# EAGLE board final esp32 pc_heart v2.3 (EAGLE 9.6.0)
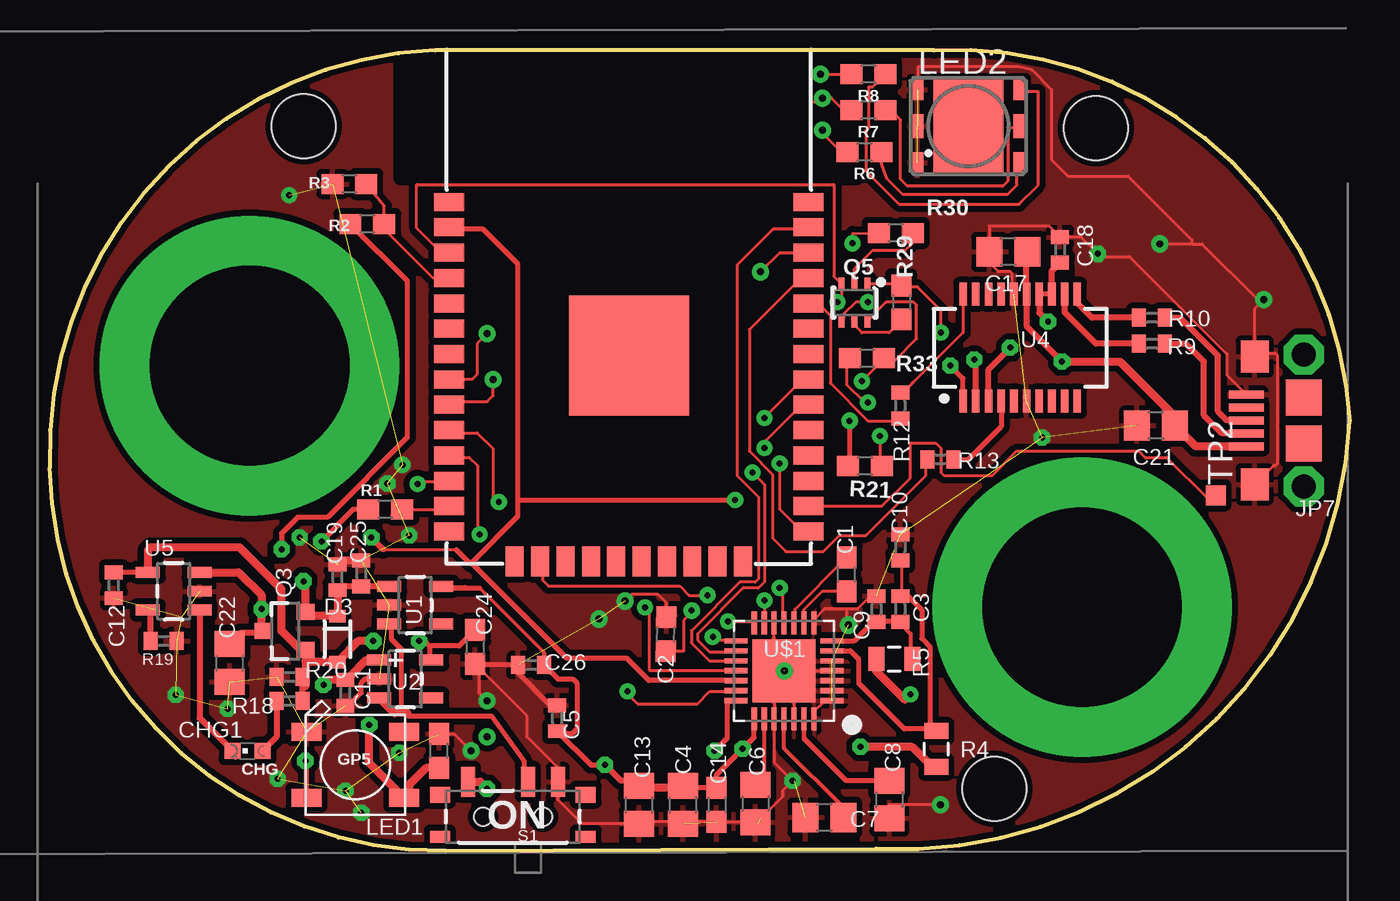
[diagram p0: board, top side]
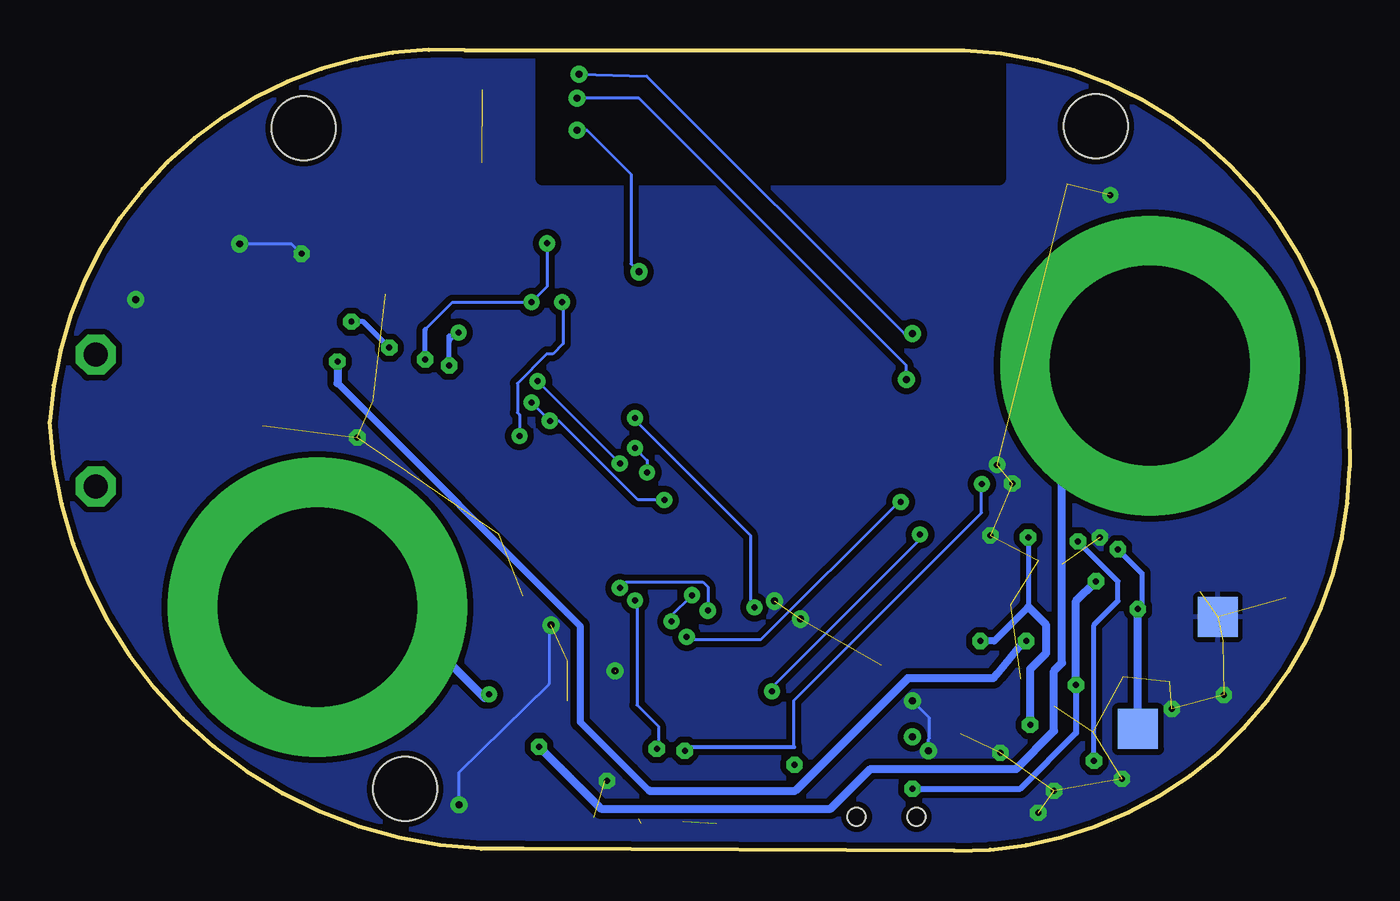
[diagram p1: board, bottom side, seen from below]

Size 65.1 x 40.12 mm. Coordinates in mm from the lower left corner, seen from the top.
Outline: 44.3,40.1 19.3,40.1 arc90 0,19.2 arc90 19.8,0 41.4,0.1 arc90 65.1,21.5 arc90 44.3,40.1
Copper layers (1*16): Top 0.035mm / dielectric 1.5mm / Bottom 0.035mm
Design rules "Circuitects-Rules *": minimum track width 6mil, minimum drill 0.3mm, track to track 6mil, track to pad 6mil, pad to pad 6mil, via to via 6mil, smd to smd 6mil, copper to edge 10mil, drill to drill 8mil, minimum pad ring 12mil, minimum via ring 10mil, stop-mask expansion 4mil, vias tented up to drill 25mil, thermal gap 10mil
Net classes: 2 gnd: width 0.254 mm, drill 0.254 mm, clearance 0.178 mm
Holes 3.2 mm at 47.3,3.1 12.7,36.3 52.4,36.2

## Footprints (pad centres in the part's own frame; a part is rotated, then mirrored left to right if it is on the bottom)
C0603 = smd 1.1 x 1: 1 -0.85,0; 2 0.85,0
C0402 = smd 0.7 x 0.9: 1 -0.65,0; 2 0.65,0
C0805 = smd 1.3 x 1.5: 1 -0.95,0; 2 0.95,0
0603 = smd 1.1 x 1: 1 -0.85,0; 2 0.85,0
CHIPLED_0603 = smd 0.8 x 0.8: A 0,-0.75; C 0,0.75
SOD-323 = smd 0.63 x 0.83: A 1.15,0; C -1.15,0
MICRO-B = smd 0.4 x 1.75: 1 -1.25,2.975; 2 -0.6,2.975; 3 0.05,2.975; 4 0.7,2.975; 5 1.35,2.975 | smd 1.8 x 1.8: P$1 -1.1,0.1; P$2 1.2,0.1 | drill 1.2 pad 2 octagon: P$3 -3.25,0.1; P$4 3.35,0.1 | smd 1.6 x 1.4: P$5 -3.15,2.55; P$6 3.25,2.55
WS2812B = smd 1.5 x 0.9: 1-VDD 2.45,-1.65; 2-DOUT 2.45,1.65; 3-GND -2.45,1.65; 4-DIN -2.45,-1.65
F50360 = smd 0.6 x 1.05: BA 2.55,1.825; BC -2.55,1.825; RA 2.55,-1.825; RC -2.55,-1.825 | smd 0.6 x 1.2: GA 2.55,0; GC -2.55,0 | smd 3.5 x 4.7: NC 0,0
SOT23-3 = smd 0.8 x 0.9: 1 -0.95,-1; 2 0.95,-1; 3 0,1.1
SC70-6 = smd 0.3 x 0.66: 1 -0.65,-0.92; 2 0,-0.92; 3 0.65,-0.92; 4 0.65,0.92; 5 0,0.92; 6 -0.65,0.92
0805 = smd 0.8 x 1.2: 1 -0.9,0; 2 0.9,0
R0402 = smd 0.7 x 0.9: 1 -0.65,0; 2 0.65,0
SWITCH-SPST-SMD-A = smd 0.7 x 1.5: 1 -2.25,-1.75; 2 -0.75,-1.75; 3 2.25,-1.75 | smd 1 x 0.6: GND1 -3.65,1; GND3 3.65,1 | smd 1 x 0.8: GND2 -3.65,-1.1; GND4 3.65,-1.1 | hole 0.9: -1.5,0; 1.5,0
TP20SQ = smd 2 x 2: TP 0,0
TP10SQ = smd 1 x 1: TP 0,0
SOT23-5 = smd 0.55 x 1.2: 1 -0.95,-1.3; 2 0,-1.3; 3 0.95,-1.3; 4 0.95,1.3; 5 -0.95,1.3
ESP-WROOM-32 = smd 0.9 x 1.5: 1 7.7,9; 2 6.43,9; 3 5.16,9; 4 3.89,9; 5 2.62,9; 6 1.35,9; 7 0.08,9; 8 -1.19,9; 9 -2.46,9; 10 -3.73,9; 11 -5,9; 12 -6.27,9; 13 -7.54,9; 14 -8.81,9; 25 -8.81,-9; 26 -7.54,-9; 27 -6.27,-9; 28 -5,-9; 29 -3.73,-9; 30 -2.46,-9; 31 -1.19,-9; 32 0.08,-9; 33 1.35,-9; 34 2.62,-9; 35 3.89,-9; 36 5.16,-9; 37 6.43,-9; 38 7.7,-9 | smd 1.5 x 0.9: 15 -10.3,5.715; 16 -10.3,4.445; 17 -10.3,3.175; 18 -10.3,1.905; 19 -10.3,0.635; 20 -10.3,-0.635; 21 -10.3,-1.905; 22 -10.3,-3.175; 23 -10.3,-4.445; 24 -10.3,-5.715 | smd 6 x 6: GND 0,0
SSOP20_L = smd 0.381 x 1.143: 1 -2.857,-2.68; 2 -2.223,-2.68; 3 -1.587,-2.68; 4 -0.953,-2.68; 5 -0.318,-2.68; 6 0.318,-2.68; 7 0.953,-2.68; 8 1.587,-2.68; 9 2.223,-2.68; 10 2.857,-2.68; 11 2.857,2.68; 12 2.223,2.68; 13 1.587,2.68; 14 0.953,2.68; 15 0.318,2.68; 16 -0.318,2.68; 17 -0.953,2.68; 18 -1.587,2.68; 19 -2.223,2.68; 20 -2.857,2.68
QFN-28 = smd 1.15 x 0.27: 1 -2.4,1.5; 2 -2.4,1; 3 -2.4,0.5; 4 -2.4,0; 5 -2.4,-0.5; 6 -2.4,-1; 7 -2.4,-1.5; 15 2.4,-1.5; 16 2.4,-1; 17 2.4,-0.5; 18 2.4,0; 19 2.4,0.5; 20 2.4,1; 21 2.4,1.5 | smd 0.27 x 1.15: 8 -1.5,-2.4; 9 -1,-2.4; 10 -0.5,-2.4; 11 0,-2.4; 12 0.5,-2.4; 13 1,-2.4; 14 1.5,-2.4; 22 1.5,2.4; 23 1,2.4; 24 0.5,2.4; 25 0,2.4; 26 -0.5,2.4; 27 -1,2.4; 28 -1.5,2.4 | smd 3.15 x 3.15: THERMAL 0,0

## Placement (x,y rotation side)
C1  1uF  [C0603]  39.91,13.84 90 top
C2  1nF  [C0603]  30.86,10.84 88.7 top
C3  1000pF  [C0402]  42.6,12.1 270 top
C4  10uF  [C0805]  31.7,2.3 270 top
C5  1uF  [C0402]  25.41,6.64 90 top
C6  10uF  [C0805]  35.34,2.36 270 top
C7  10uF  [C0805]  38.79,1.66 180 top
C8  1uF  [C0805]  42.04,2.56 270 top
C9  10pF  [C0402]  41.4,12.1 90 top
C10  10pF  [C0402]  42.6,15.2 90 top
C11  1u  [C0402]  14.8,7.9 90 top
C12  0.1uF  [C0402]  3.2,13.3 270 top
C13  1uF  [C0805]  29.5,2.3 270 top
C14  10uF  [C0603]  33.4,2.3 270 top
C17  10uF  [C0805]  48,30 180 top
C18  0.1uF  [C0402]  50.6,30.1 90 top
C19  1.0uF  [C0402]  14.4,13.7 90 top
C20  0.1uF  [0603]  19.5,5 90 top
C21  4.7u  [C0805]  55.4,21.3 180 top
C22  4.7u  [C0805]  9,9.4 270 top
C24  2.2uF  [C0603]  21.3,10.2 270 top
C25  1u  [C0402]  15.6,13.9 270 top
C26  1u  [C0402]  24.1,9.3 0 top
CHG1  RED  [CHIPLED_0603]  9.9,5 90 top
D3  BAT20J  [SOD-323]  14.4,10.6 270 top
JP7  MICRO-B  [MICRO-B]  62.9,21.5 90 top
LED1  WS2812B5050  [WS2812B]  15.3,4.3 0 top
LED2  F50360  [F50360]  46,36.3 0 top
Q3  2.5A/30V  [SOT23-3]  11.8,11 90 top
Q5  MBT3904DW1T1  [SC70-6]  40.3,27.46 180 top
R1  10k  [0603]  16.8,17.1 0 top
R2  10k  [0603]  15.9,31.4 180 top
R3  10k  [0603]  15,33.4 0 top
R4  49.9K  [0805]  44.4,5.1 90 top
R5  49.9K  [0805]  42.3,9.6 0 top
R6  560  [0603]  40.8,35 180 top
R7  560  [0603]  41,37.1 180 top
R8  560  [0603]  41,38.9 180 top
R9  27  [R0402]  55.2,25.4 180 top
R10  27  [R0402]  55.2,26.7 180 top
R12  1K  [R0402]  42.6,22.3 90 top
R13  1K  [R0402]  44.6,19.6 0 top
R18  330R  [R0402]  12,7.5 180 top
R19  1k  [R0402]  5.7,10.5 180 top
R20  10K  [R0402]  12,8.7 0 top
R21  10k  [0603]  40.82,19.27 180 top
R29  10k  [0603]  42.65,27.47 270 top
R30  10k  [0603]  42.37,30.95 0 top
R33  10k  [0603]  40.93,24.67 180 top
S1  PCM12SMTR  [SWITCH-SPST-SMD-A]  23.19,1.7 180 top
TP1  TPSQTP20SQ  [TP20SQ]  6.6,11.7 0 bottom
TP2  PTR1TP10SQ  [TP10SQ]  58.4,17.8 0 top
TP4  TPSQTP20SQ  [TP20SQ]  10.6,6.1 0 bottom
U1  AP2112K-1.8V  [SOT23-5]  18.3,12.3 270 top
U2  AP2112K-3.3V  [SOT23-5]  17.8,8.6 270 top
U3  ESP-WROOM-32  [ESP-WROOM-32]  29,24.8 90 top
U4  FTS31XS-U  [SSOP20_L]  48.6,25.2 0 top
U5  MCP73831  [SOT23-5]  6.2,13 90 top
U$1  MAX30003CTI+  [QFN-28]  36.77,9.01 180 top

## Library data of the parts
C1-C14 C17-C19 C21 C22 C24-C26 R9 R10 R12 R13 R18-R20 = rcl
C20 = SparkFun-Capacitors; PROD_ID: CAP-00810
CHG1 LED2 = led
D3 = SparkFun-DiscreteSemi; PROD_ID: DIO-11623
JP7 U$1 = circuitects
LED1 = adafruit
Q3 = SparkFun-DiscreteSemi; PROD_ID: TRANS-11308
Q5 = esp32-thing-temp; PROD_ID: TRANS-13337
R1-R3 R6-R8 R21 R29 R30 R33 = SparkFun-Resistors; PROD_ID: RES-00824
R4 R5 U5 = SparkFun
S1 = SparkFun-Electromechanical; PROD_ID: SWCH-10651
TP1 TP2 TP4 = testpad
U1 U2 = SparkFun-PowerIC; PROD_ID: VREG-12457
U3 = esp32
U4 = SparkFun-DigitalIC; PROD_ID: IC-11524

## Nets
0: Q5.6 R33.1 U3.25
1.8V: C4.1 C5.1 C13.1 C14.1 C26.2 U1.5 U$1.13 U$1.22
3.3V: C20.1 C24.1 LED1.1-VDD R21.2 R33.2 U2.5 U3.2 U$1.19
3.3V_F: C18.1 U4.3 U4.13 U4.14
5: U3.29
BAT_MON: R2.1 R3.2 U3.4
CHIP_PU: Q5.3 R21.1 U3.3
CSB: U3.10 U$1.15
D+: JP7.3 R10.1
D-: JP7.2 R9.1
DTR: Q5.1 R29.1 U4.1
ECG_N: R5.1
ECG_P: R4.1
ECGN: C3.2 C9.1 R5.2 U$1.7
ECGP: C3.1 C10.1 R4.2 U$1.6
EN: S1.2 U1.3 U2.3
FCLK: U3.16 U$1.14
GND: C2.2 C4.2 C5.2 C6.2 C7.2 C8.2 C9.2 C10.2 C11.1 C12.2 C13.2 C14.2 C17.2 C18.2 C19.2 C20.2 C21.2 C22.2 C24.2 C25.1 C26.1 JP7.5 JP7.P$5 JP7.P$6 LED1.3-GND LED2.BC LED2.GC LED2.RC R3.1 R19.1 R20.1 S1.1 TP1.TP U1.2 U2.2 U4.6 U4.16 U5.2 U$1.1 U$1.2 U$1.3 U$1.4 U$1.5 U$1.8 U$1.12 U$1.24 U$1.26 U$1.28 U$1.THERMAL
INT2B: U3.11 U$1.20
INTB: U3.12 U$1.21
MISO: U3.31 U$1.18
MOSI: U3.37 U$1.17
N$1: LED1.4-DIN R1.1
N$2: C6.1 U$1.23
N$3: C1.1 U$1.9
N$4: TP2.TP U3.26
N$5: CHG1.C U5.1
N$6: C1.2 U$1.10
N$7: C2.1 U$1.11
N$9: R9.2 U4.12
N$10: LED2.RA R6.1
N$11: R10.2 U4.11
N$12: R7.2 U3.9
N$13: C7.1 U$1.25
N$14: C8.1 U$1.27
N$15: LED2.BA R8.1
N$16: CHG1.A R18.2
N$17: LED2.GA R7.1
N$19: R19.2 U5.5
N$20: R8.2 U3.8
N$22: R6.2 U3.36
N$23: Q5.5 R29.2
N$24: Q5.2 R30.2
RTS: Q5.4 R30.1 U4.2
RXD: R13.2 U4.4
SCLK: U3.30 U$1.16
TXD: R12.2 U4.20
U0RXD: R12.1 U3.34
U0TXD: R13.1 U3.35
VBAT: C22.1 Q3.3 R2.2 TP4.TP U5.3
VIN: C11.2 C19.1 C25.2 D3.C Q3.2 S1.3 U1.1 U2.1
VUSB: C12.1 C17.1 C21.1 D3.A JP7.1 Q3.1 R18.1 R20.2 U4.15 U5.4
WS2812/GPIO14: R1.2 U3.13

## Tracks (layer width: path | path; a pad name or v marks a point on that pad's centre or on a via)
0  (via drill 0.3)
  Top 0.152: Q5.6 40.97,26.56 41.89,27.48 43.26,27.48 43.41,27.33 43.41,25.66 42.34,24.58 41.8,24.58 R33.1 41.78,24.63 v40.67,23.52 | v36.55,19.4 36.55,17.12 37.62,16.05 37.93,16.05 U3.25
  Bottom 0.152: v40.67,23.52 v36.55,19.4
1.8V  (via drill 0.3)
  Top 0.152: 24.72,8.97 24.75,8.97 C26.2 | 27.1,4.3 25.55,5.85 C5.1 25.21,5.99 | v35.79,12.54 35.79,11.48 U$1.13 | 19.64,13.15 U1.5 | U1.5 20.8,13.25 | U1.5 19.66,13.25
  Top 0.184: 21.52,13.15 24.75,9.93
  Top 0.194: 24.75,9.93 C26.2
  Top 0.252: 35.27,5.67 U$1.22 | 19.64,13.15 21.52,13.15
  Top 0.254: 35.27,5.67 v34.7,5.1 33.4,3.8 C14.1 31.8,3.15 C4.1 | 24.95,9.3 C26.2 25.45,8.6 26.2,8.6 26.4,8.4 26.4,6.1 26.15,5.85 25.55,5.85 | C5.1 27.1,4.3 v27.8,4.3
  Top 0.305: C13.1 29.5,3.5 28.6,3.5 v27.8,4.3 | C26.2 24.75,9
  Top 0.406: C4.1 31.6,3.15 29.6,3.15 C13.1
  Bottom 0.152: v35.79,12.54 35.69,12.45 35.69,7.3 34.62,6.23 34.62,5.17 v34.7,5.1
3.3V  (via drill 0.3)
  Top 0.152: v40.97,22.45 40.82,22.45 39.91,23.36 39.91,24.5 R33.2 | 40.06,19.29 R21.2 | U$1.19 34.35,8.53 | 20.35,15.09 16.7,15.09 16.7,15.1 | 20.09,31.14 U3.2 | 19.03,10.25 | U2.5 19.03,9.62
  Top 0.252: v40.06,21.54 40.06,19.29 | 19.03,9.62 19.03,10.25 20.5,10.25 C24.1 | 34.35,8.53 30.01,8.53 28.89,9.65 25.89,9.65 21.11,14.43 | 20.35,15.09 21.06,14.38 21.11,14.43 | 20.09,31.14 21.7,31.14 23.45,29.39 23.45,17.57 | 23.45,17.57 23.45,16.76 21.11,14.43 | v18.5,10.5 18.78,10.5 19.03,10.25 | 23.45,17.57 v34.33,17.57
  Top 0.305: 16.7,15.1 v16.1,15.7
  Top 0.406: C20.1 18.85,4.15 18,3.3 18,2.9 LED1.1-VDD 16,4.4 v16,6.3
  Bottom 0.152: v40.97,22.45 v40.06,21.54 39.6,21.54 35.64,17.57 v34.33,17.57
  Bottom 0.254: v16.1,15.7 16.1,12.2
  Bottom 0.305: 16.07,15.73 v16.1,15.7
  Bottom 0.354: 16.1,12.2 17.8,10.5 v18.5,10.5
  Bottom 0.406: v16,6.3 16,9.1 15.2,9.9 15.2,11.3 16.1,12.2
3.3V_F  (via drill 0.3)
  Top 0.254: U4.13 U4.14
  Top 0.305: U4.13 50.19,29.04 C18.1 | U4.3 47.01,24.11 v48.1,25.2 | U4.14 49.55,26.95 v50,26.5
  Bottom 0.254: v48.1,25.2 49.4,26.5 v50,26.5
BAT_MON
  Top 0.152: R3.2 16.75,32.29 R2.1 16.94,30.94 19.18,28.7 19.94,28.7 U3.4
CHIP_PU  (via drill 0.3)
  Top 0.152: U3.3 19.94,30.07 19.48,30.07 18.38,31.18 18.38,33.37 39.26,33.37 39.26,28.77 Q5.3 39.65,27.68 v39.45,27.48 | v41.58,20.77 41.58,19.29 R21.1
  Bottom 0.152: v41.58,20.77 41.58,21.84 41.69,21.95 41.69,23.41 40.21,24.89 39.91,24.89 39.4,25.4 39.4,27.43 v39.45,27.48
CSB  (via drill 0.3)
  Top 0.152: v33.2,10.72 33.35,10.56 34.27,10.56 U$1.15 | v22.49,17.47 22.19,17.77 22.19,20.14 21.4,20.93 20.09,20.93 U3.10
  Bottom 0.152: v33.2,10.72 33.05,10.56 29.5,10.56 22.59,17.47 v22.49,17.47
D+
  Top 0.305: JP7.3 58.95,21.55 58.5,22 58.5,24.8 56.6,26.7 R10.1
D-
  Top 0.305: JP7.2 58.7,20.9 57.8,21.8 57.8,24.5 56.9,25.4 R9.1
DTR  (via drill 0.3)
  Top 0.152: Q5.1 40.97,28.39 42.65,28.39 R29.1 42.65,28.24 43.45,28.24 44.63,27.06 v44.63,25.96
  Top 0.254: U4.1 45.74,23.66 v45.1,24.3
  Bottom 0.152: v44.63,25.96 45.09,25.5 45.1,25.5
  Bottom 0.254: v45.1,24.3 45.1,25.5 45.1,25.8
ECG_N  (via drill 0.3, 10 pad 15)
  Top 0.406: v43.11,7.84 42.83,7.56 41.4,8.99 R5.1
  Bottom 0.152: 51.64,12.09 v51.7,12.2
  Bottom 0.406: v43.11,7.84 43.31,7.63 47.77,12.09 51.64,12.09
ECG_P  (via drill 0.3, 10 pad 15)
  Top 0.406: R4.1 44.2,4.2 43.2,5.2 v40.6,5.2
  Bottom 0.406: v40.6,5.2 37.5,2.1 26,2.1 24,4.1 16.7,4.1 14.8,6 14.8,9 14.4,9.4 14.4,19.9 v10,24.3
ECGN
  Top 0.152: 43.11,9.66 R5.2 | 42.65,11.32 C3.2
  Top 0.202: 43.11,9.66 43.11,10.87 42.65,11.32
  Top 0.252: C3.2 42.57,11.48 41.43,11.48 C9.1 41.25,11.45 40.31,10.51 U$1.7
ECGP
  Top 0.152: C3.1 42.65,12.85 42.65,14.52 C10.1 | 44.08,6.14 44.17,6.14 R4.2
  Top 0.252: 39.75,10.01 U$1.6 | 43.67,12.05 42.97,12.75 C3.1
  Top 0.254: U$1.6 40.09,10.01 40.5,9.6 40.5,8.4 42.8,6.1 44.3,6.1 R4.2 | 43.67,12.05 43.67,10.63 44.08,10.22 44.08,6.14 44.08,6.02 44.1,6
EN
  Top 0.152: S1.2 23.74,3.65 | 17.96,6.75 17.9,6.9
  Top 0.242: 23.74,4.49 22.11,6.75
  Top 0.252: 17.96,6.75 22.11,6.75 | 23.74,4.49 23.74,3.65
  Top 0.254: U1.3 17.1,11.25 17.1,10.6 17.6,10.1 17.6,7.2 17.9,6.9
  Top 0.406: 17.9,6.9 17.25,6.9 U2.3
FCLK  (via drill 0.3)
  Top 0.152: v33.96,11.48 35.18,11.48 U$1.14 | v32.94,12.8 32.02,12.8 31.56,13.26 24.98,13.26 24.67,13.57 24.67,14.37 U3.16
  Bottom 0.152: v32.94,12.8 33.96,11.78 v33.96,11.48
GND  (via drill 0.3, 0.35)  (40 unrouted)
  Top 0.152: U$1.THERMAL 36.71,8.89 36.4,8.58 36.4,7.52 36.3,7.52 36.3,6.64 U$1.24 36.27,4.43 v37.2,3.5 | U$1.12 36.27,9.51 36.3,9.49 36.3,9.44 36.71,9.04 U$1.THERMAL | U$1.26 37.26,7.52 36.73,7.52 36.77,7.69 U$1.THERMAL | U$1.THERMAL 36.67,9.01 | U$1.THERMAL U$1.4 | C9.2 41.1,12.75 40.45,12.1 39.9,12.1 | 39.9,12.1 38.8,12.1 38.27,11.57 U$1.8 | U$1.28 38.27,6.97 38.81,7.51 U$1.1 | v37.2,3.5 36.7,3 36.7,2.7 35.6,1.6 | v37.2,3.5 37.3,3.5 | JP7.5 59.87,22.91 58.96,23.82 58.96,24.89 54.08,29.77 52.56,29.77 v52.5,29.9 51.65,30.75 C18.2 50.05,31.3 47.05,31.3 C17.2 47.05,29.45 47.5,29 48.1,29 48.2,28.9 48.2,27.96 U4.16 | 30.87,11.87 C2.2 | C2.2 30.88,11.79 30.79,11.88 | C20.2 20.25,5.85 v21.1,5 | 21.33,9.38 C24.2 23.9,6.75 23.9,5.69 25.44,4.15 S1.1 25.44,2.56 26.65,1.35 C13.2 29.6,1.45 C14.2 33.44,1.41 C6.2 35.48,1.37 | 39.9,12.1 39.9,11.4 v40,11.3 | v44.6,2.3 42.04,2.3 C8.2 | JP7.P$6 60.35,24.9 | 60.35,24.9 60.35,27.15 v60.8,27.6 60.5,27.6 57.7,30.4 57.2,30.4 | JP7.P$5 61.3,19.3 61.4,19.3 61.5,19.4 61.5,24.8 61.4,24.9 60.35,24.9 | 57.2,30.4 57.2,30.6 54,33.8 51,33.8 50.17,34.63 50.17,38.13 49.15,39.15 48.51,39.3 43.5,39.3 43.5,38.18 LED2.BC | 57.2,30.4 v55.6,30.4 | C2.2 30.88,12.42 30.45,12.85 29.15,12.85 v28.8,12.5 | 30.76,11.88 C2.2 | C5.2 25.06,7.29 | C26.1 23.45,8.9
  Top 0.182: v21.9,7.5 21.5,7.9 21.5,9.22 21.41,9.31 21.33,9.38
  Top 0.252: 25.06,7.29 23.45,8.9
  Top 0.254: C11.1 14.95,7.25 15.6,7.9 15.6,8.4 15.8,8.6 U2.2 | C26.1 21.42,9.3 21.41,9.31
  Top 0.406: C25.1 14.6,14.55 C19.2
  Bottom 0.152: v21.1,5 21.1,5.57 21.04,5.63 21.04,6.64 v21.9,7.5 | v40,11.3 40.1,11.3 40.1,8.33 44.6,3.93 v44.6,2.3 | v52.5,29.9 53,30.4 v55.6,30.4
  other vias: 11.98,32.84 17.66,19.33 17.5,4.9 49.7,20.7 16.9,18.4 18,15.8 6.3,7.8 11.4,3.6 15.6,1.9 8.9,7.1 14.8,3 12.5,15.7 27.5,11.6 36.8,9
  pour Bottom (isolate 0.305, rank 6): 65,0.1 -0.6,0.2 -0.6,39.83 65,39.83
  pour Top (isolate 0.305, rank 6): -0.6,0.2 65,0.1 65,39.83 -0.6,39.83
INT2B  (via drill 0.3)
  Top 0.152: v28.93,7.97 28.93,7.87 29.44,7.36 32.44,7.36 33.05,7.97 34.27,7.97 U$1.20 | v21.51,15.84 21.41,15.94 21.41,19.29 21,19.71 20.09,19.71 U3.11
  Bottom 0.152: v28.93,7.97 28.93,8.17 21.51,15.59 v21.51,15.84
INTB  (via drill 0.3)
  Top 0.152: U$1.21 34.07,7.51 | v18.42,18.37 18.42,18.49 19.94,18.49 U3.12
  Top 0.252: 34.07,7.51 33.92,7.36 33.92,5.62
  Top 0.254: 33.92,5.62 v33.3,5
  Bottom 0.152: 27.82,5.2 27.82,7.53 18.44,16.92 18.44,18.11 18.42,18.12 v18.42,18.37
  Bottom 0.2: 27.82,5.2 33.1,5.2 v33.3,5
MISO  (via drill 0.3)
  Top 0.152: v29.81,12.19 30.01,11.99 30.01,9.04 34.27,9.04 U$1.18 | v35.79,21.68 v35.79,21.69 37.62,23.52 37.93,23.52 U3.31
  Bottom 0.152: v29.81,12.19 30.01,12.39 30.01,15.8 35.79,21.58 v35.79,21.68
MOSI
  Top 0.152: U$1.17 34.27,9.5 33.05,9.5 32.13,10.41 32.13,11.02 34.57,13.46 35.34,13.46 35.49,13.61 35.49,17.73 34.42,18.79 34.42,29.34 36.22,31.14 37.93,31.14 U3.37
N$1  (via drill 0.3)
  Top 0.254: LED1.4-DIN 12.85,4.45 v12.8,4.5 | R1.1 15.2,17.1 v13.6,15.5
  Bottom 0.254: v12.8,4.5 12.8,11.3 11.6,12.5 11.6,13.5 v13.6,15.5
N$2
  Top 0.2: U$1.23 35.77,3.74 C6.1
N$3
  Top 0.152: C1.1 39.9,13 38.69,13 37.77,12.09 37.77,11.48 U$1.9
N$4
  Top 0.152: TP2.TP 58,17.64 55.93,19.71 54.85,19.71 54.54,20.01 48.42,20.01 47.2,18.79 44.78,18.79 44.63,18.95 44.63,20.16 44.38,20.42 43.1,20.42 43.1,18.68 41.69,17.27 38.08,17.27 U3.26
N$5
  Top 0.305: U5.1 7.5,6.65 CHG1.C
N$6
  Top 0.152: C1.2 39.81,14.58 37.32,12.09 37.32,11.48 U$1.10
N$7  (via drill 0.3)
  Top 0.152: v32.15,12.02 32.15,11.92 31.75,11.52 31.75,9.99 C2.1 | v36.55,13.15 36.71,13 36.71,11.48 U$1.11
  Bottom 0.152: v32.15,12.02 32.15,13.22 32.39,13.46 36.25,13.46 v36.55,13.15
N$8  (via drill 0.35)
  other vias: 21.9,5.7
N$9
  Top 0.305: R9.2 52.4,25.4 50.82,26.98 U4.12
N$10
  Top 0.152: LED2.RA 48.44,34.45 48.44,33.34 47.98,32.89 42.7,32.89 41.91,33.67 41.65,34.44 R6.1
N$11
  Top 0.305: R10.2 52.2,26.7 51.46,27.44 U4.11
N$12  (via drill 0.35)
  Top 0.152: U3.9 20.16,22.5 21.9,22.5 22.2,22.8 v22.2,23.6 | 40.3,37.1 R7.2 39.75,37.1 39.15,37.7 38.29,37.51 v38.7,37.7
  Bottom 0.152: v22.2,23.6 22.2,24.3 35.6,37.7 v38.7,37.7
N$13
  Top 0.2: C7.1 39.74,2.16 36.77,5.13
  Top 0.202: 36.77,5.13 U$1.25
N$14
  Top 0.222: U$1.27 37.77,5.63
  Top 0.254: C8.1 39.89,3.51 37.77,5.63
N$15
  Top 0.152: LED2.BA 48.65,38.03 49.5,38.03 49.5,33.34 48.54,32.38 42.54,32.38 40.87,34.05 40.87,36.07 41,36.2 41,38.26 41.2,38.26 R8.1
N$16
  Top 0.305: R18.2 11.35,5.7 CHG1.A
N$17
  Top 0.152: R7.1 41.93,37.28 42.6,36.61 42.6,33.64 42.95,33.29 47.73,33.29 47.98,33.54 47.98,36.2 LED2.GA
N$19
  Top 0.305: R19.2 5.05,11.9 U5.5
N$20  (via drill 0.35)
  Top 0.152: U3.8 21.15,23.61 21.4,23.86 21.4,25.4 v21.9,25.9 | v38.6,38.9 R8.2
  Bottom 0.152: v38.6,38.9 35.21,38.81 22.3,25.9 v21.9,25.9
N$22  (via drill 0.35)
  Top 0.152: v35.6,29 36.56,29.96 U3.36 | v38.7,36.1 38.62,36.03 39.65,35 R6.2
  Bottom 0.152: v35.6,29 36,29.4 36,33.9 38.2,36.1 v38.7,36.1
N$23
  Top 0.152: Q5.5 40.36,26.41 40.36,26.26 40.67,25.96 42.04,25.96 42.65,26.56 R29.2
N$24
  Top 0.152: R30.2 43.22,30.45 42.82,30.05 41.2,30.05 40.3,29.15 Q5.2
RTS  (via drill 0.3)
  Top 0.152: v40.97,27.48 40.36,27.48 39.75,26.87 39.75,26.56 Q5.4 | v40.2,30.43 40.2,30.91 R30.1
  Top 0.305: U4.2 46.38,24.52 v46.3,24.6
  Bottom 0.152: 46.3,26.11 46.31,26.11 44.94,27.48 v40.97,27.48 40.2,28.25 v40.2,30.43
  Bottom 0.254: v46.3,24.6 46.3,26.11
RXD
  Top 0.254: R13.2 46,19.6 47.65,21.25 U4.4
SCLK  (via drill 0.3)
  Top 0.152: v35.18,18.95 35.79,18.34 35.79,13.46 35.49,13.15 34.73,13.15 32.44,10.87 32.44,10.56 33.05,9.95 34.27,9.95 U$1.16 | v35.79,20.16 35.79,20.47 37.62,22.3 37.93,22.3 U3.30
  Bottom 0.152: v35.18,18.95 35.18,19.55 v35.79,20.16
TXD
  Top 0.152: U4.20 45.74,25.95 43.26,23.47 42.8,22.95 R12.2
U0RXD
  Top 0.152: R12.1 42.55,21.54 40.97,21.54 39.09,23.42 39.09,26.82 38.58,27.33 38.08,27.33 U3.34
U0TXD
  Top 0.152: R13.1 43.87,19.55 43.87,18.79 40.87,15.79 39.55,15.79 38.74,14.99 36.86,14.99 36.2,15.65 36.2,18.84 35.03,20.01 35.03,26.11 37.47,28.55 37.93,28.55 U3.35
VBAT  (via drill 0.3)
  Top 0.254: R2.2 17.9,28.55 17.9,20.7 13.9,16.7 12.4,16.7 11.6,15.9 v11.6,15.1
  Top 0.305: Q3.3 10.6,10.9 9.55,10.9 C22.1
  Top 0.406: U5.3 9.45,13.95 10.6,12.8 v10.6,12.1 10.6,10.8 Q3.3
  Bottom 0.254: v11.6,15.1 10.4,13.9 10.4,12.3 v10.6,12.1
  Bottom 0.406: TP4.TP v10.6,12.1
VIN  (via drill 0.3)
  Top 0.305: U1.1 C25.2 14.6,13.25 C19.1
  Top 0.406: C19.1 D3.C 12.9,11.75 Q3.2 12.8,13.3 12.7,13.3 v12.7,13.5 | S1.3 21.55,3.45 v21.9,3.1 | U2.1 15.85,9.55 15,8.7 C11.2 13.95,8.55 v13.7,8.3
  Bottom 0.305: v21.9,3.1 16.5,3.1 13.7,5.9 v13.7,8.3
  Bottom 0.406: v13.7,8.3 13.7,12.5 v12.7,13.5
VUSB  (via drill 0.3)
  Top 0.254: U5.4 C12.1
  Top 0.305: C17.1 48.92,29.63 U4.15 48.92,26.28 v50.7,24.5 | R18.1 R20.2
  Top 0.405: v50.7,24.5 53.6,24.5 54.8,23.3
  Top 0.406: JP7.1 57.4,20.25 C21.1 56.35,21.75 54.8,23.3 | 12.8,9.5 Q3.1 12.8,9.8 11.6,11 11.6,13.1 9.5,15.2 5.05,15.2 4.9,15.05 U5.4 | 12.8,9.5 12.8,8.25 R20.2 | v16.2,10.5 15.45,10.5 D3.A 12.85,9.45 12.8,9.5
  Bottom 0.152: 36.05,3.96
  Bottom 0.352: 36.05,3.96 35.09,3
  Bottom 0.355: 36.05,3.96 38.53,6.44 38.53,11.25 50.7,23.42
  Bottom 0.405: 35.09,3 27.76,3 | v50.7,24.5 50.7,23.42
  Bottom 0.406: 27.76,3 22.12,8.63 17.85,8.63 17.68,8.84 16.27,10.57 v16.2,10.5
WS2812/GPIO14
  Top 0.152: U3.13 19.8,17.06 17.69,17.06 R1.2
  Top 0.2: 17.15,16.8 R1.2

## Text on the board
tPlace: R19 | + | CHG | GP5 | ON